# Altium PCB EJ3_PCB.PcbDoc
Units mm, origin at the board's own origin, x right, y up, seen from the top; angles counter-clockwise.
Board outline 100.08 x 50.04 mm, 2 copper layers (Top Layer, Bottom Layer); 32 components, 19 nets, 97 pads, 25 vias.
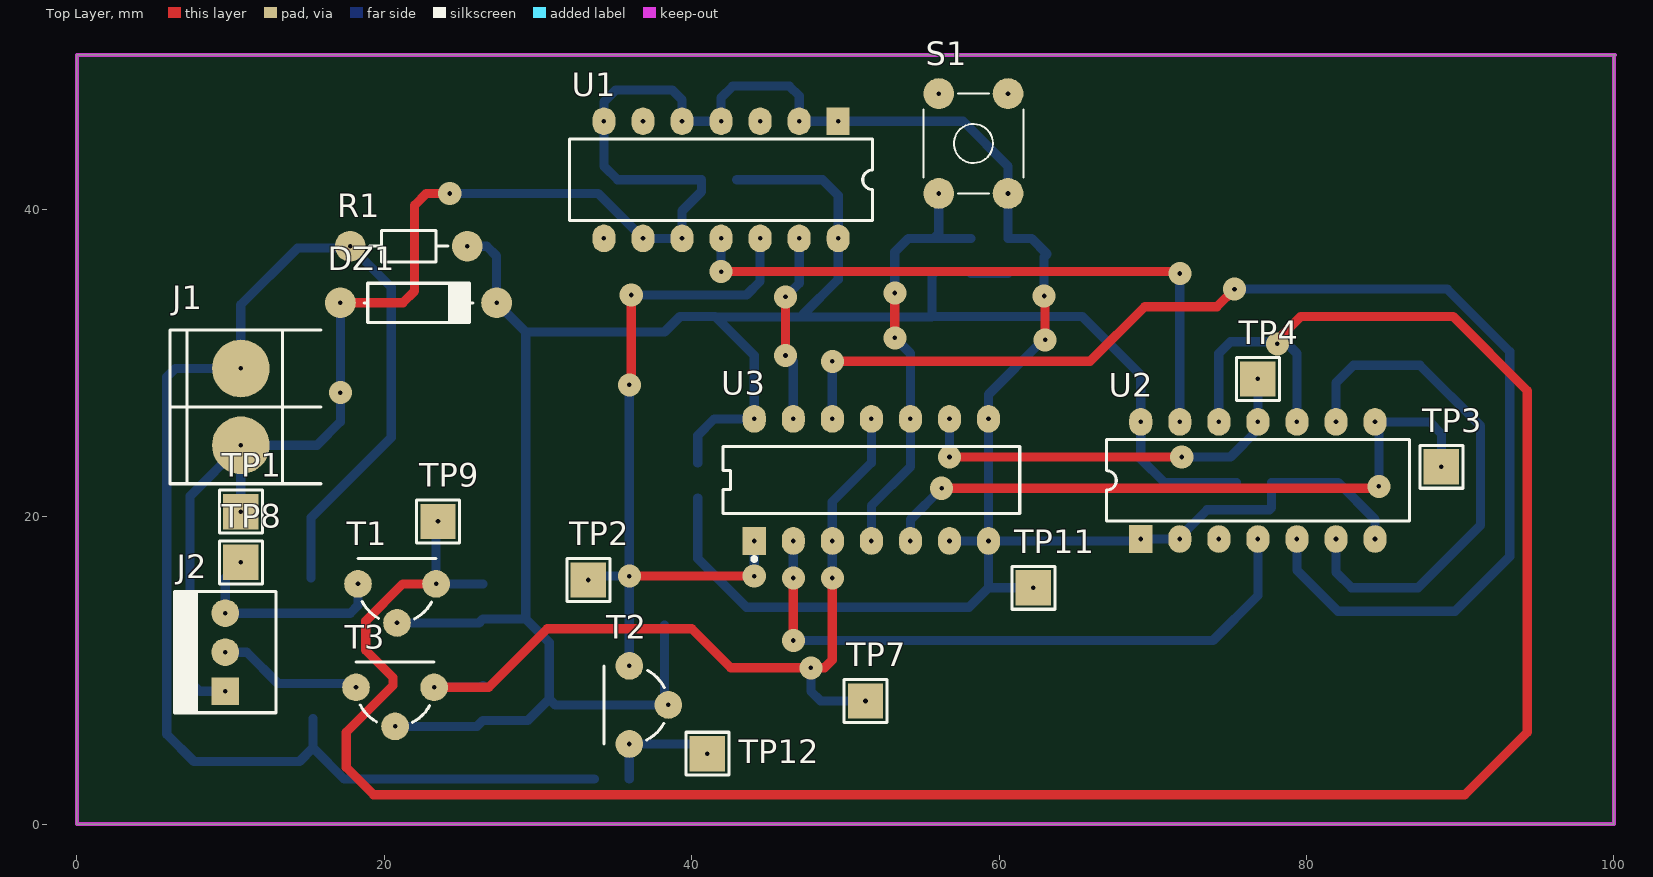
[diagram p0: Top Layer view]
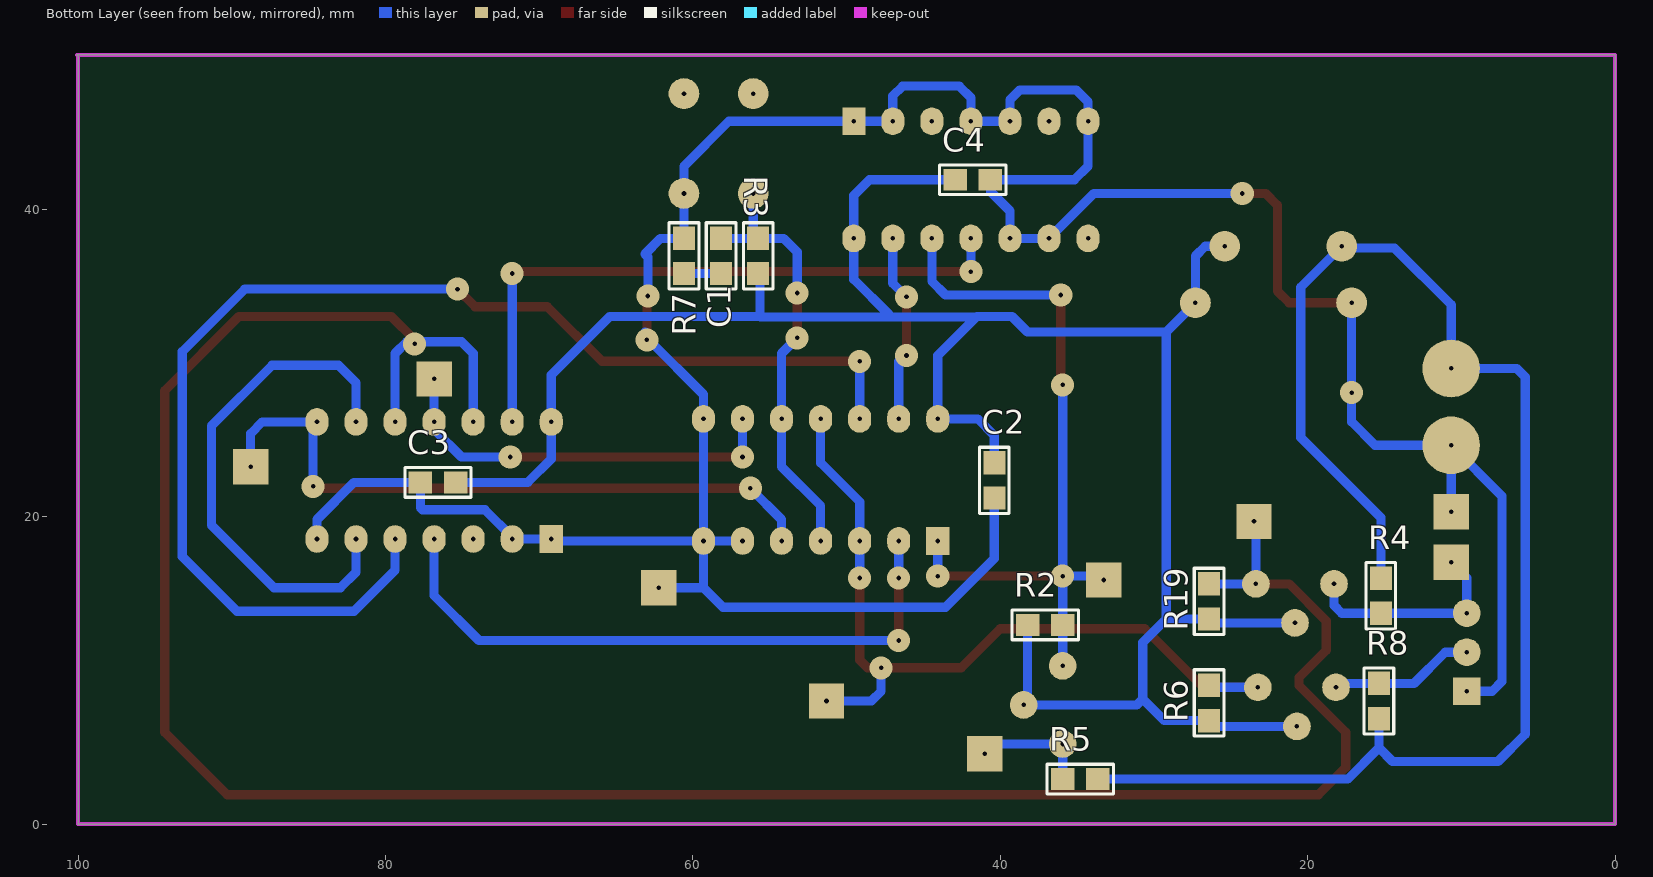
[diagram p1: Bottom Layer view, seen from below]
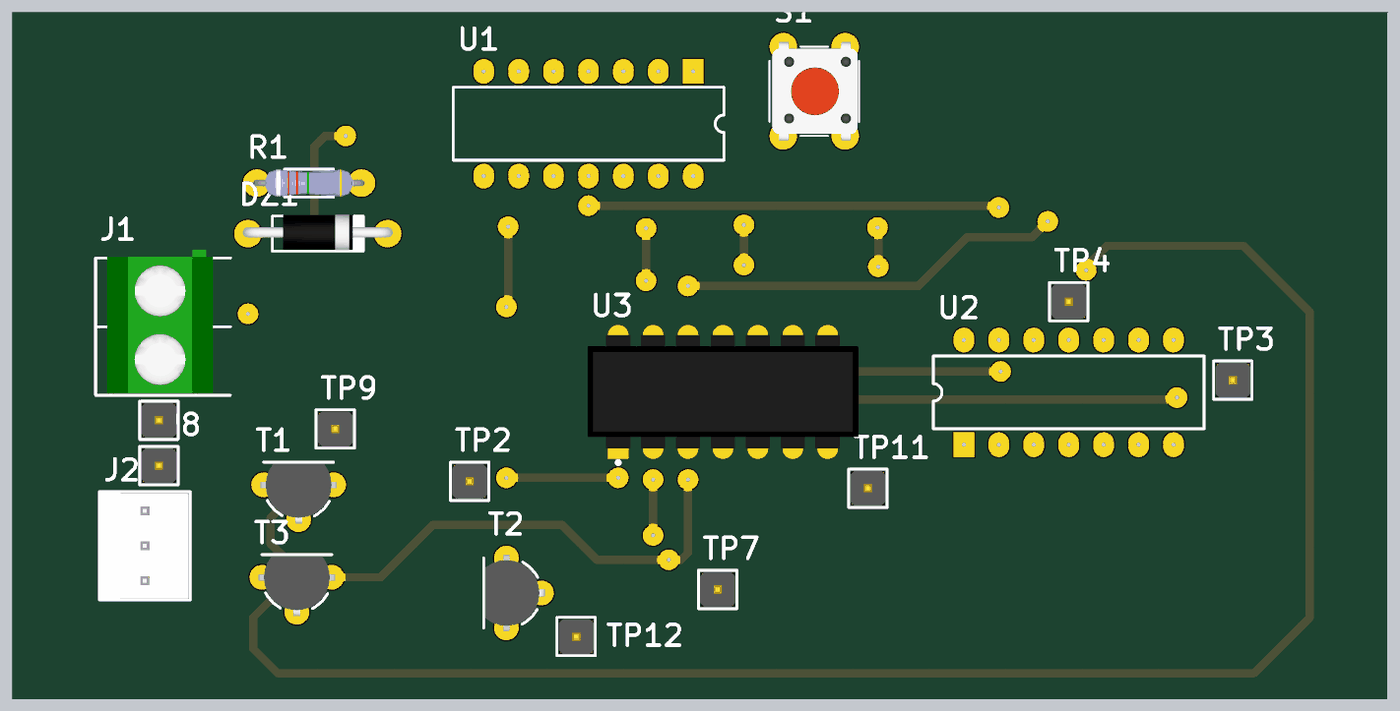
[diagram p2: 3D render of the assembled board from above, using the file's embedded part models]
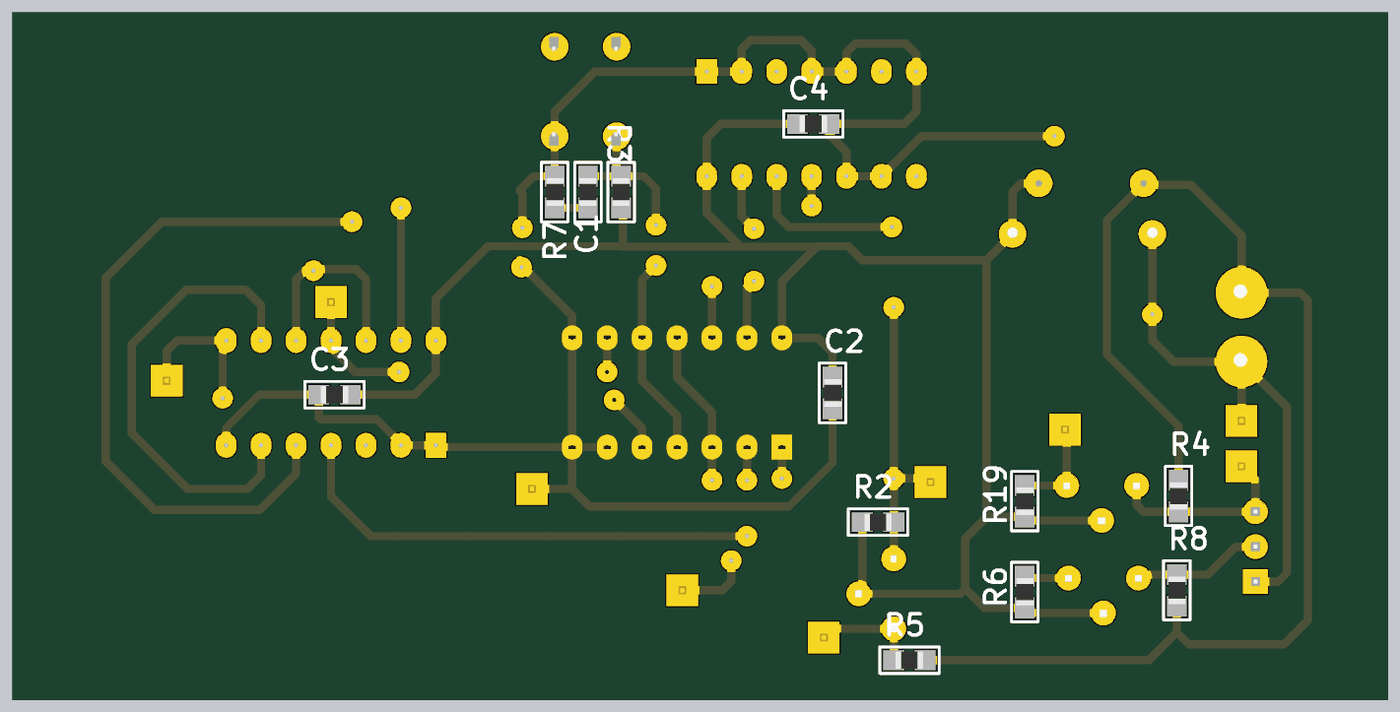
[diagram p3: 3D render of the assembled board from below, using the file's embedded part models]

## Layer stack, top to bottom
Top Solder: solder mask 0.0102, Solder Resist, Dk 3.5
Top Layer: signal copper 0.0356
Dielectric 1: dielectric 0.32, FR-4, Dk 4.8
Bottom Layer: signal copper 0.0356
Bottom Solder: solder mask 0.0102, Solder Resist, Dk 3.5

## Board outline
0,0 0,50.038 100.076,50.038 100,49.962 100,0

## Design rules (kind name [scope] priority, off if disabled: settings)
Clearance [All] p1: gap=0.254 ignorepadtopadclearanceinfootprint=FALSE except(0: Arc-Hole Track-Hole SMDPad-Hole THPad-Hole Via-Hole Fill-Hole Poly-Hole Region-Hole Text-Hole)
PolygonConnect [All] p1: connectstyle=Relief reliefconductorwidth=0.254 reliefentries=4 polygonreliefangle="90 Angle" airgapwidth=0.254
RoutingVias [All] p1: holewidth=0.711 width=1.27 viastyle="Through Hole" minholewidth=0.711 minwidth=1.27 maxholewidth=0.711 maxwidth=1.27
SolderMaskExpansion [All] p1: expansion=0.102
Width [All] p1: maxlimit=0.6 minlimit=0.6 preferedwidth=0.6
30 further rules are at their usual default settings.

## Components (designator, comment, footprint, x,y, rotation, side; value= is the part's Value field where it differs from the comment)
C1 "100n" 0805 58.166,36.957 r270 bottom
C2 "100n" 0805 40.386,22.352 r270 bottom
C3 "100n" 0805 76.581,22.225 r0 bottom
C4 "100n" 0805 41.783,41.91 r180 bottom
DZ1 "DIODO ZENER" DO41 22.225,33.909 r0 top
J1 "BORNERA 2" BORNERA2 10.668,27.138 r0 top
J2 "MOLEX3" MOLEX3 9.652,8.636 r90 top
R1 "220" RES300 17.78,37.592 r0 top
R2 "2k2" 0805 37.084,12.954 r0 bottom
R3 "100k" 0805 55.753,36.957 r270 bottom
R4 "2k2" 0805 15.24,14.859 r90 bottom
R5 "2k2" 0805 34.798,2.921 r180 bottom
R6 "2k2" 0805 26.416,7.874 r270 bottom
R7 "10k" 0805 60.579,36.957 r270 bottom
R8 "2k2" 0805 15.367,8.001 r270 bottom
R19 "2k2" 0805 26.416,14.478 r270 bottom
S1 "RESET" TACTSWITCH 58.329,44.271 r0 top
T1 "2N2222" TO92 20.828,14.351 r0 top
T2 "2N2222" TO92 37.211,7.747 r90 top
T3 "2N2222" TO92 20.701,7.62 r0 top
TP1 "GND" TPTH 10.668,20.32 r0 top
TP2 "Z_3v3" TPTH 33.274,15.875 r0 top
TP3 "Y1" TPTH 88.773,23.241 r0 top
TP4 "Y2" TPTH 76.835,28.956 r0 top
TP7 "CLOCK" TPTH 51.308,8.001 r0 top
TP8 "w" TPTH 10.668,17.018 r0 top
TP9 "w_3V3" TPTH 23.495,19.685 r0 top
TP11 "GND" TPTH 62.23,15.367 r0 top
TP12 "Z_5V" TPTH 41.021,4.572 r90 top
U1 "" N014 41.91,41.91 r180 top
U2 "" N014 76.835,22.352 r0 top
U3 "CD4013BE" Texas_Instruments_PDIP14_0 51.689,22.385 r90 top

## Footprints (in the part's own frame and the unit in brackets; to place one, negate y for a bottom-side part, rotate by r counter-clockwise, add the part's x,y. Pads: shape width x height; smd on the part's side, far side on the other; paste and mask are expansions set on the pad)
0805 [mil] "Pasivo 0805"
  rect 60x56 smd: 1(-45,0) 2(45,0)
  silkscreen extent -85,-38 85,38, body extent -39,-25 39,25, height 15
BORNERA2 [mm] "Bornera con Tornillos 5mm separación"
  round 3.75 hole 0.3: 1(0,2.5) 2(0,-2.5)
  silkscreen extent -4.6,-5 5.2,5, body extent -3.76,-4.89 3.94,5.61, height 10
DO41 [mm]
  round 2 hole 0.3: 1(-5.08,0) 2(5.08,0)
  silkscreen extent -3.56,-1.27 3.56,1.27, body extent -5.46,-1.19 5.46,1.37, height 2.03
MOLEX3 [mm]
  rect 1.8x1.8 hole 0.3: 1(0,0)
  round 1.8 hole 0.3: 2(2.54,0) 3(5.08,0)
  silkscreen extent -1.4,-3.3 6.48,3.3, body extent -1.27,-3.17 6.35,3.18, height 10.74
N014 [mm] "DIP; 14 Leads; Row Spacing 7.62 mm; Pitch 2.54 mm"
  rect 1.5x1.8 hole 0.3: 1(-7.62,-3.81)
  oval 1.5x1.8 hole 0.3: 2(-5.08,-3.81) 3(-2.54,-3.81) 4(0,-3.81) 5(2.54,-3.81) 6(5.08,-3.81) 7(7.62,-3.81) 8(7.62,3.81) 9(5.08,3.81) 10(2.54,3.81) 11(0,3.81) 12(-2.54,3.81) 13(-5.08,3.81) 14(-7.62,3.81)
  silkscreen extent -9.85,-2.65 9.85,2.65
RES300 [mm]
  round 2 hole 0.3: 1(0,0) 2(7.62,0)
  silkscreen extent 1.27,-1.02 6.35,1.02, body extent -0.25,-0.97 7.87,0.97, height 2.01
TACTSWITCH [mm]
  round 2 hole 0.3: 1(-2.25,-3.25) 2(-2.25,3.25) 3(2.25,-3.25) 4(2.25,3.25)
  silkscreen extent -3.25,-3.25 3.25,3.25, body extent -3.05,-3.95 3.15,3.95, height 7
Texas_Instruments_PDIP14_0 [mm]
  rect 1.8x1.5 hole 0.3 paste-1000 mask+0: 1(-3.97,7.62)
  oval 1.8x1.5 hole 0.3 paste-1000 mask+0: 2(-3.97,5.08) 3(-3.97,2.54) 4(-3.97,0) 5(-3.97,-2.54) 6(-3.97,-5.08) 7(-3.97,-7.62) 8(3.97,-7.62) 9(3.97,-5.08) 10(3.97,-2.54) 11(3.97,0) 12(3.97,2.54) 13(3.97,5.08) 14(3.97,7.62)
  silkscreen extent -5.27,-9.65 2.17,9.65, body extent -4.69,-9.94 4.69,9.94, height 0.25
TO92 [mm]
  round 1.8 hole 0.3: 1(0,-1.27) 2(2.54,1.27) 3(-2.54,1.27)
  silkscreen extent -2.54,-1 2.54,2.92, body extent -2.79,-1.55 2.79,2.79, height 8
TPTH [mm]
  rect 2.3x2.3 hole 0.3: 1(0,0)
  silkscreen extent -1.4,-1.4 1.4,1.4, body extent -1.27,-1.27 1.27,1.27, height 6.04

## Part data
C1 C2 C3 C4: library part CAP
R1 R2 R3 R4 R5 R6 R7 R8 R19: library part RES
S1: library part "TACT SWITCH"
TP1 TP2 TP3 TP4 TP7 TP8 TP9 TP11 TP12: library part TP
U1: library part SN74HC32N, "Quadruple 2-Input Positive-OR Gate", ComponentLink1Description="Manufacturer Link", ComponentLink1URL=http://www.ti.com/, ComponentLink2Description=Datasheet, ComponentLink2URL=http://www-s.ti.com/sc/ds/sn74hc32.pdf, DatasheetVersion=May-1997, LatestRevisionDate=04-Mar-2005, LatestRevisionNote="Stylized 3D Model Added.", PackageDescription="DIP; 14 Leads; Row Spacing 7.62 mm; Pitch 2.54 mm", PackageReference=N014, PackageVersion=Oct-1995, Published=8-Jun-2000, Publisher="Altium Limited"
U2: library part SN74AC08N, "Quadruple 2-Input Positive-AND Gate", ComponentLink1Description="Manufacturer Link", ComponentLink1URL=http://www.ti.com/, ComponentLink2Description=Datasheet, ComponentLink2URL=http://www-s.ti.com/sc/ds/sn74ac08.pdf, ComponentLink3Description="Packaging Specification", ComponentLink3URL=http://focus.ti.com/lit/ml/mpdi002c/mpdi002c.pdf, DatasheetVersion=Sep-1996, LatestRevisionDate=04-Mar-2005, LatestRevisionNote="Stylized 3D Model Added.", PackageDescription="DIP; 14 Leads; Row Spacing 7.62 mm; Pitch 2.54 mm", PackageReference=N014, PackageVersion=Oct-1995, Published=8-Jun-2000, Publisher="Altium Limited"

## Via types
v1: diameter 1.5, hole 0.3, Top Layer to Bottom Layer, 25 vias

## Nets (pads, with @x,y where several pads share a name; then routed paths per layer and width w, separated by ;. In a path a pad name is that pad's centre, name@x,y a point inside that pad or via, vN(x,y) a via of type N, cw(c..) or ccw(c..) an arc to the next point about the centre after c; other vN are vias at no path point)
3.3V: C2.1 C3.1 C4.1 DZ1.2 R1.2 R2.2 R3.2 R6.2 R19.2 T1.1 T2.1 T3.1 U1.14 U2.14 U3.14 | length 151.6
  Bottom Layer w0.6: T3.1 26.035,6.35 R6.2 29.337,6.731 30.734,8.128 ; T1.1 26.162,13.081 R19.2 29.21,13.335 ; R1.2 26.67,37.592 27.305,36.957 DZ1.2 29.21,32.004 ; R2.2 38.227,8.001 T2.1 31.115,7.747 30.734,8.128 ; C2.1 40.386,25.273 41.468,26.355 U3.14 44.069,30.48 41.563,32.986 ; C4.1 48.514,41.91 49.53,40.894 U1.14 49.53,35.433 47.244,33.147 ; R3.2 55.626,35.941 55.626,33.02 ; C3.1 70.739,22.225 69.215,23.749 U2.14 69.215,29.21 65.405,33.02 55.626,33.02 ; 29.21,13.335 29.21,32.004 ; 29.21,13.335 30.734,11.811 30.734,8.128 ; 29.21,32.004 38.227,32.004 39.243,33.02 41.529,33.02 41.563,32.986 ; 41.563,32.986 55.592,32.986 55.626,33.02
5V: J1.1 R1.1 R4.2 R5.2 R8.2 | length 97.7
  Bottom Layer w0.6: R4.2 15.24,19.939 20.447,25.146 20.447,34.925 R1.1@17.907,37.465 ; R8.2 15.367,4.953 ; R1.1 R1.1@17.907,37.465 ; R5.2 17.399,2.921 15.367,4.953 ; 15.367,4.953 14.478,4.064 7.62,4.064 5.842,5.842 5.842,29.083 6.397,29.638 J1.1 10.668,33.782 14.351,37.465 R1.1@17.907,37.465
CLOCK_3V3: R6.1 T3.2 TP7.1 U3.3 U3.11 | length 54.1
  Top Layer w0.6: T3.2 26.797,8.89 30.607,12.7 40.005,12.7 42.545,10.16 v1(47.752,10.16) 48.641,10.16 49.149,10.668 v1(49.149,16.002)
  Bottom Layer w0.6: T3.2 26.289,8.89 R6.1 ; v1(47.752,10.16) 47.752,8.636 48.387,8.001 TP7.1 ; v1(49.149,16.002) U3.3 49.149,20.955 51.689,23.495 U3.11
CLOCK_5V: J2.2 R8.1 T3.3 | length 9.5
  Bottom Layer w0.6: J2.2 11.049,11.176 13.081,9.144 R8.1 17.907,9.144 T3.3
GND: C2.2 C3.2 C4.2 DZ1.1 J1.2 J2.1 R7.1 S1.3 TP1.1 TP11.1 U1.1 U1.2 U1.4 U1.5 U1.7 U1.9 U1.10 U2.1 U2.2 U2.7 U3.6 U3.7 U3.8 | length 208.7
  Top Layer w0.6: DZ1.1 21.209,33.909 21.971,34.671 21.971,40.259 22.733,41.021 v1(24.257,41.021) ; v1(62.928,34.353) 62.992,34.29 v1(62.992,31.496)
  Bottom Layer w0.6: J2.1 8.001,8.636 7.366,9.271 7.366,21.336 J1.2 ; TP1.1 J1.2 ; DZ1.1 v1(17.145,28.067) 17.145,26.162 15.621,24.638 J1.2 ; v1(24.257,41.021) 33.909,41.021 U1.9 U1.10 39.37,39.878 40.64,41.148 C4.2 35.179,41.91 34.29,42.799 U1.7 34.29,46.99 35.052,47.752 38.735,47.752 39.37,47.117 U1.5 U1.4 41.91,47.244 42.672,48.006 46.355,48.006 46.99,47.371 U1.2 U1.1 57.658,45.72 60.579,42.799 S1.3 R7.1 62.103,38.1 63.119,37.084 62.928,36.893 v1(62.928,34.353) v1@63.119,34.163 ; C2.2 40.386,17.272 43.561,14.097 58.039,14.097 59.309,15.367 ; U3.6 U3.7 ; TP11.1 59.309,15.367 ; v1@63.119,32.004 62.992,31.877 v1(62.992,31.496) 62.865,31.496 59.309,27.94 U3.8 U3.7 ; U2.7 84.455,19.812 82.042,22.225 C3.2 77.724,20.574 77.597,20.447 73.533,20.447 71.755,18.669 U2.2 U2.1 69.088,18.415 U3.7 ; 59.309,15.367 U3.7
IN_3V3: R19.1 T1.2 TP9.1 U2.10 U2.12 | length 159.2
  Top Layer w0.6: T1.2 21.209,15.621 18.796,13.208 18.796,11.303 20.574,9.525 20.574,9.017 17.526,5.969 17.526,3.683 19.304,1.905 90.297,1.905 94.361,5.969 94.361,28.194 89.535,33.02 79.629,33.02 v1@78.105,31.496
  Bottom Layer w0.6: TP9.1 23.368,19.558 T1.2 R19.1 ; U2.12 74.295,30.607 75.057,31.369 78.613,31.369 79.375,30.607 U2.10
  other v1: 78.105,31.242
IN_5V: J2.3 R4.1 T1.3 TP8.1 | length 14
  Bottom Layer w0.6: TP8.1 9.652,16.002 J2.3 R4.1 17.78,13.716 18.288,14.224 T1.3
NetC1_2: C1.2 R7.2 | length 2.4
  Bottom Layer w0.6: C1.2 R7.2
NetU1_11: U1.11 U2.13 | length 41.5
  Top Layer w0.6: v1(41.91,35.941) 71.628,35.941 v1(71.755,35.814)
  Bottom Layer w0.6: v1@41.91,36.195 U1.11 ; U2.13 v1(71.755,35.814)
NetU1_13: U1.13 U3.13 | length 12.4
  Top Layer w0.6: v1(46.101,30.48) v1(46.101,34.29)
  Bottom Layer w0.6: v1(46.101,30.48) 46.482,30.099 46.609,30.099 U3.13 ; v1(46.101,34.29) 46.99,35.179 U1.13
NetU2_4: U2.4 U3.2 | length 41.3
  Top Layer w0.6: v1(46.609,11.938) v1(46.609,16.002)
  Bottom Layer w0.6: v1(46.609,11.938) 73.914,11.938 76.835,14.859 U2.4 ; v1@46.609,16.256 U3.2
NetU2_5: U2.5 U3.12 | length 83.2
  Top Layer w0.6: v1(49.149,30.099) 65.913,30.099 69.469,33.655 74.168,33.655 v1(75.311,34.798)
  Bottom Layer w0.6: U3.12 v1(49.149,30.099) ; v1(75.311,34.798) 89.154,34.798 93.218,30.734 93.218,17.399 89.662,13.843 82.042,13.843 79.375,16.51 U2.5
NetU2_6: U2.6 U2.9 | length 34.2
  Bottom Layer w0.6: U2.6 81.915,16.383 82.931,15.367 87.249,15.367 91.313,19.431 91.313,25.908 87.376,29.845 83.058,29.845 81.915,28.702 U2.9
RESET: C1.1 R3.1 S1.1 U3.4 U3.10 | length 28.6
  Top Layer w0.6: v1(53.213,31.623) v1(53.213,34.544)
  Bottom Layer w0.6: U3.4 51.689,20.701 54.229,23.241 U3.10 54.229,30.607 v1(53.213,31.623) ; v1(53.213,34.544) 53.213,37.211 54.102,38.1 R3.1 ; S1.1 56.079,38.426 R3.1 ; C1.1 R3.1
VCC: 
Y1: TP3.1 U2.8 U3.5 | length 43.9
  Top Layer w0.6: v1(56.261,21.844) 84.582,21.844 v1(84.709,21.971)
  Bottom Layer w0.6: U3.5 54.229,19.812 v1(56.261,21.844) ; v1(84.709,21.971) 84.709,25.908 U2.8 88.011,26.162 88.773,25.4 TP3.1
Y2: TP4.1 U2.11 U3.9 | length 26.6
  Top Layer w0.6: v1(56.769,23.876) v1(71.882,23.876)
  Bottom Layer w0.6: v1(56.769,23.876) U3.9 ; v1(71.882,23.876) 75.057,23.876 76.835,25.654 U2.11 TP4.1
Z_3V3: R2.1 T2.2 TP2.1 U1.12 U3.1 | length 48.9
  Top Layer w0.6: v1(35.941,16.129) v1(44.069,16.129) ; v1(35.941,28.575) 36.068,28.702 v1(36.068,34.417)
  Bottom Layer w0.6: TP2.1 33.528,16.129 v1(35.941,16.129) ; T2.2 R2.1 v1(35.941,16.129) ; v1(35.941,28.575) v1(35.941,16.129) ; v1(36.068,34.417) 43.561,34.417 44.45,35.306 U1.12 ; v1(44.069,16.129) U3.1
Z_5V: R5.1 T2.3 TP12.1 | length 7.6
  Bottom Layer w0.6: R5.1 T2.3 40.386,5.207 TP12.1
pads on no net: S1.2 S1.4 U1.3 U1.6 U1.8 U2.3

## Keep-outs
Keep-Out Layer:
  the board outline again, w0.254